# EAGLE board Water Sensor Schematic (EAGLE 8.7.0)
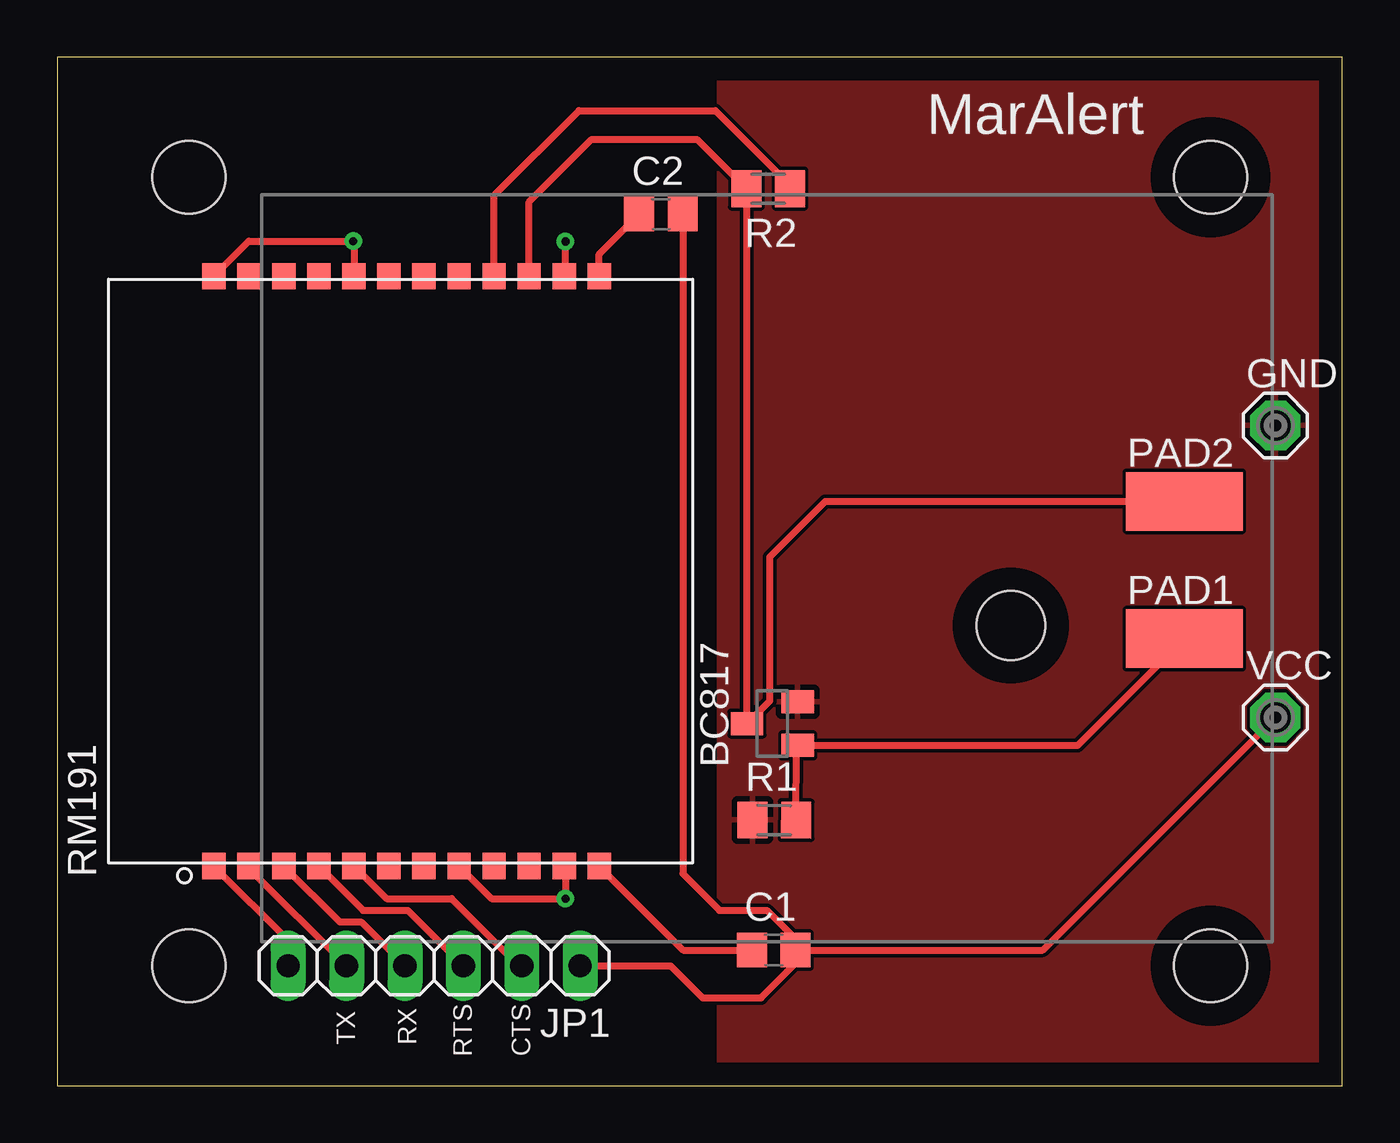
[diagram p0: board, top side]
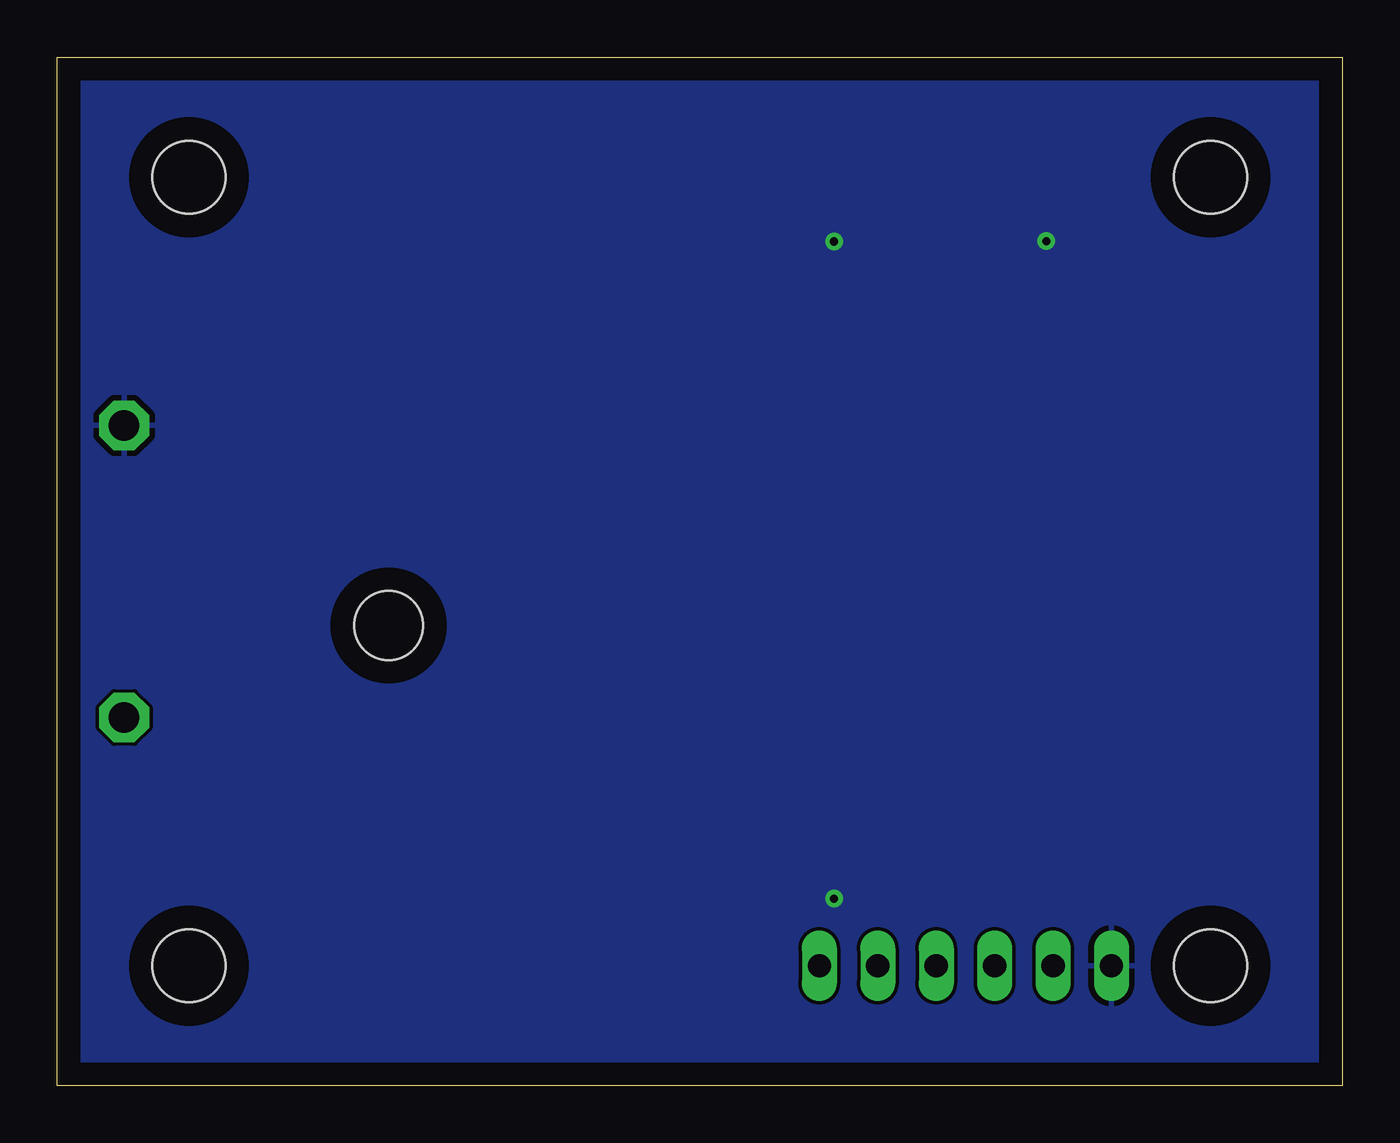
[diagram p1: board, bottom side, seen from below]

Size 55.88 x 44.7 mm. Coordinates in mm from the lower left corner, seen from the top.
Outline: 0,0 55.88,0 55.88,44.7 0,44.7 0,0
Copper layers (1*16): Top 0.035mm / dielectric 1.5mm / Bottom 0.035mm
Design rules "default": minimum track width 6mil, minimum drill 0.35mm, track to track 6mil, track to pad 6mil, pad to pad 6mil, via to via 6mil, smd to smd 6mil, copper to edge 40mil, drill to drill 6mil, minimum pad ring 10mil, minimum via ring 8mil, stop-mask expansion 4mil, vias tented up to drill 0mil, thermal gap 10mil
Holes 3.17 mm at 5.71,5.21 5.71,39.5 50.16,39.5 50.16,5.21
Holes 3 mm at 41.48,20

## Footprints (pad centres in the part's own frame; a part is rotated, then mirrored left to right if it is on the bottom)
SOT23 = smd 1 x 1.4: 1 -0.95,-1.1; 2 0.95,-1.1; 3 0,1.1
C0805 = smd 1.3 x 1.5: 1 -0.95,0; 2 0.95,0
SE13 = drill 1.321 pad 2.159 octagon: MP 0,0
1X06 = drill 1.016 long: 1 -6.35,0; 2 -3.81,0; 3 -1.27,0; 4 1.27,0; 5 3.81,0; 6 6.35,0
SMD2,54-5,08 = smd 2.54 x 5.08: 1 0,0
M0805 = smd 1.3 x 1.6: 1 -0.95,0; 2 0.95,0
RM191 = smd 1.143 x 1.016: P$1 -12.827,8.382; P$2 -12.827,6.858; P$3 -12.827,5.334; P$4 -12.827,3.81; P$5 -12.827,2.286; P$6 -12.827,0.762; P$7 -12.827,-0.762; P$8 -12.827,-2.286; P$9 -12.827,-3.81; P$10 -12.827,-5.334; P$11 -12.827,-6.858; P$12 -12.827,-8.382; P$13 12.827,-8.382; P$14 12.827,-6.858; P$15 12.827,-5.334; P$16 12.827,-3.81; P$17 12.827,-2.286; P$18 12.827,-0.762; P$19 12.827,0.762; P$20 12.827,2.286; P$21 12.827,3.81; P$22 12.827,5.334; P$23 12.827,6.858; P$24 12.827,8.382

## Placement (x,y rotation side)
BC817  [SOT23]  31.1,15.74 90 top
C1  0.1uF  [C0805]  31.16,5.89 0 top
C2  0.1uF  [C0805]  26.25,37.89 0 top
GND  SE13  [SE13]  52.98,28.7 0 top
JP1  [1X06]  16.38,5.21 180 top
PAD1  [SMD2,54-5,08]  49.02,19.43 270 top
PAD2  [SMD2,54-5,08]  49.02,25.4 270 top
R1  50K  [M0805]  31.18,11.54 359.8 top
R2  1k  [M0805]  30.92,39 180 top
RM191  RM191RM1XX  [RM191]  15.18,22.37 90 top
VCC  SE13  [SE13]  52.98,16 0 top

## Library data of the parts
BC817 = semicon-smd-ipc
C1 C2 = rcl; SPICEPREFIX: C
GND VCC = solpad
JP1 = pinhead
PAD1 PAD2 = wirepad
R1 R2 = rcl; SPICEPREFIX: R
RM191 = MarAlert

## Nets
GND: BC817.2 GND.MP JP1.6 R1.1 RM191.P$1 RM191.P$8 RM191.P$11 RM191.P$14 RM191.P$20 RM191.P$24
N$1: JP1.5 RM191.P$2
N$2: BC817.1 PAD1.1 R1.2
N$3: R2.1 RM191.P$16
N$4: C2.1 RM191.P$13
N$5: JP1.4 RM191.P$3
N$6: BC817.3 PAD2.1 R2.2 RM191.P$15
N$7: JP1.3 RM191.P$4
N$9: JP1.2 RM191.P$5
N$11: C1.1 RM191.P$12
N$12: C1.2 C2.2 JP1.1 VCC.MP

## Tracks (layer width: path | path; a pad name or v marks a point on that pad's centre or on a via)
GND  (via drill 0.35)
  Top 0.305: 6.8,9.56 RM191.P$1 10.03,6.31 JP1.6 | RM191.P$14 22.1,35.19 v22.1,36.7 | RM191.P$20 12.9,36.72 v12.87,36.72 8.33,36.72 RM191.P$24 | RM191.P$11 22.1,9.48 v22.1,8.13 18.88,8.13 RM191.P$8
  pour Bottom: 0.01,-0.25 0.01,18.25 0.07,18.5 0.07,44.5 55.9,44.75 55.9,0.25
  pour Top: 28.76,0 28.76,44.37 55.77,44.75 55.65,0
N$1
  Top 0.305: JP1.5 8.32,9.46 RM191.P$2
N$2
  Top 0.305: R1.2 32.14,14.73 BC817.1 44.38,14.79 PAD1.1
N$3
  Top 0.305: RM191.P$16 18.99,38.7 22.68,42.39 28.62,42.39 31.87,39.14 R2.1
N$4
  Top 0.305: RM191.P$13 23.57,36.15 C2.1
N$5
  Top 0.305: RM191.P$3 12.28,7.11 13.21,7.11 JP1.4
N$6
  Top 0.305: RM191.P$15 20.52,38.42 23.24,41.15 27.82,41.15 R2.2 29.97,15.77 BC817.3 30.99,16.73 30.99,22.99 33.4,25.4 PAD2.1
N$7
  Top 0.305: JP1.3 15.24,7.62 13.29,7.62 RM191.P$4
N$9
  Top 0.305: RM191.P$5 14.31,8.13 17.14,8.13 20.07,5.21 JP1.2
N$11
  Top 0.305: RM191.P$12 27.22,5.89 C1.1
N$12
  Top 0.305: C2.2 27.2,9.21 28.8,7.62 30.86,7.62 32.1,6.38 C1.2 | JP1.1 26.67,5.21 28.07,3.81 30.61,3.81 32.1,5.31 C1.2 | C1.2 42.87,5.89 VCC.MP

## Text on the board
tNames: MarAlert | TX | RX | RTS | CTS